# Altium PCB line abu2.PcbDoc
Units mm, origin at the board's own origin, x right, y up, seen from the top; angles counter-clockwise.
Board outline 152.4 x 101.6 mm, 2 copper layers (Top Layer, Bottom Layer); 21 components, 12 nets, 63 pads, 0 vias.
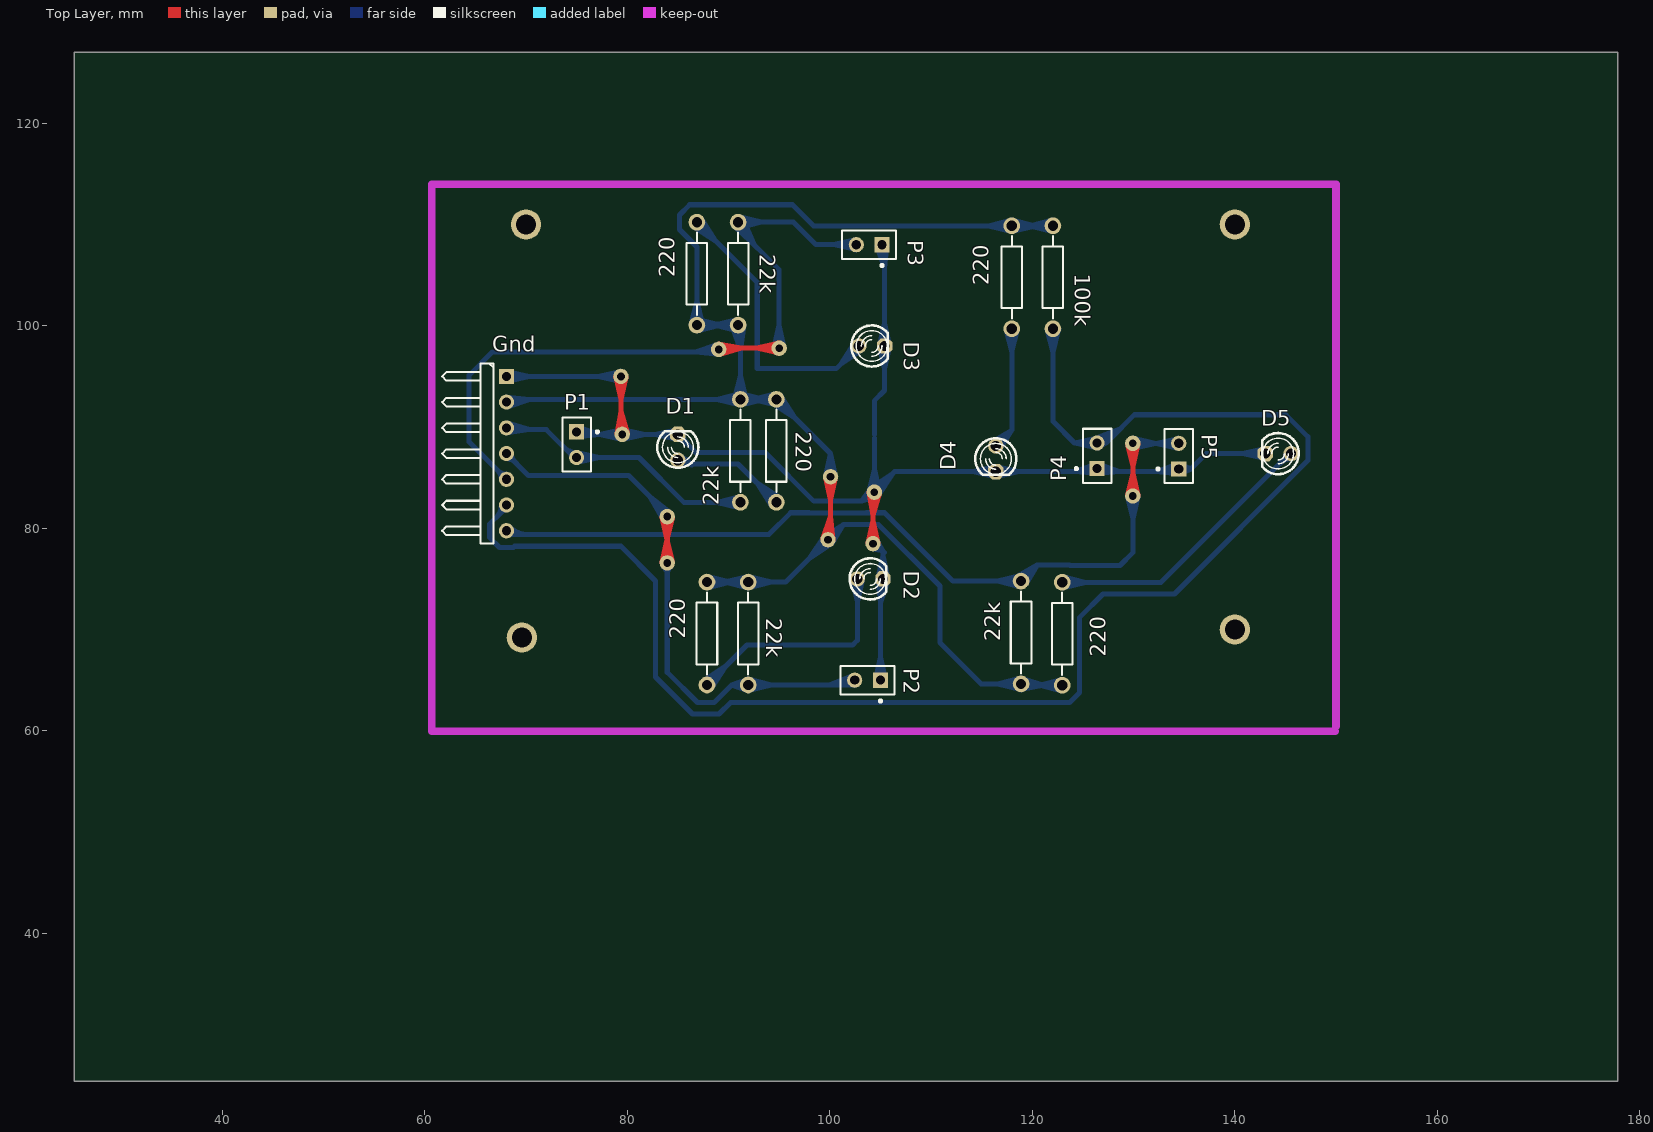
[diagram p0: Top Layer view]
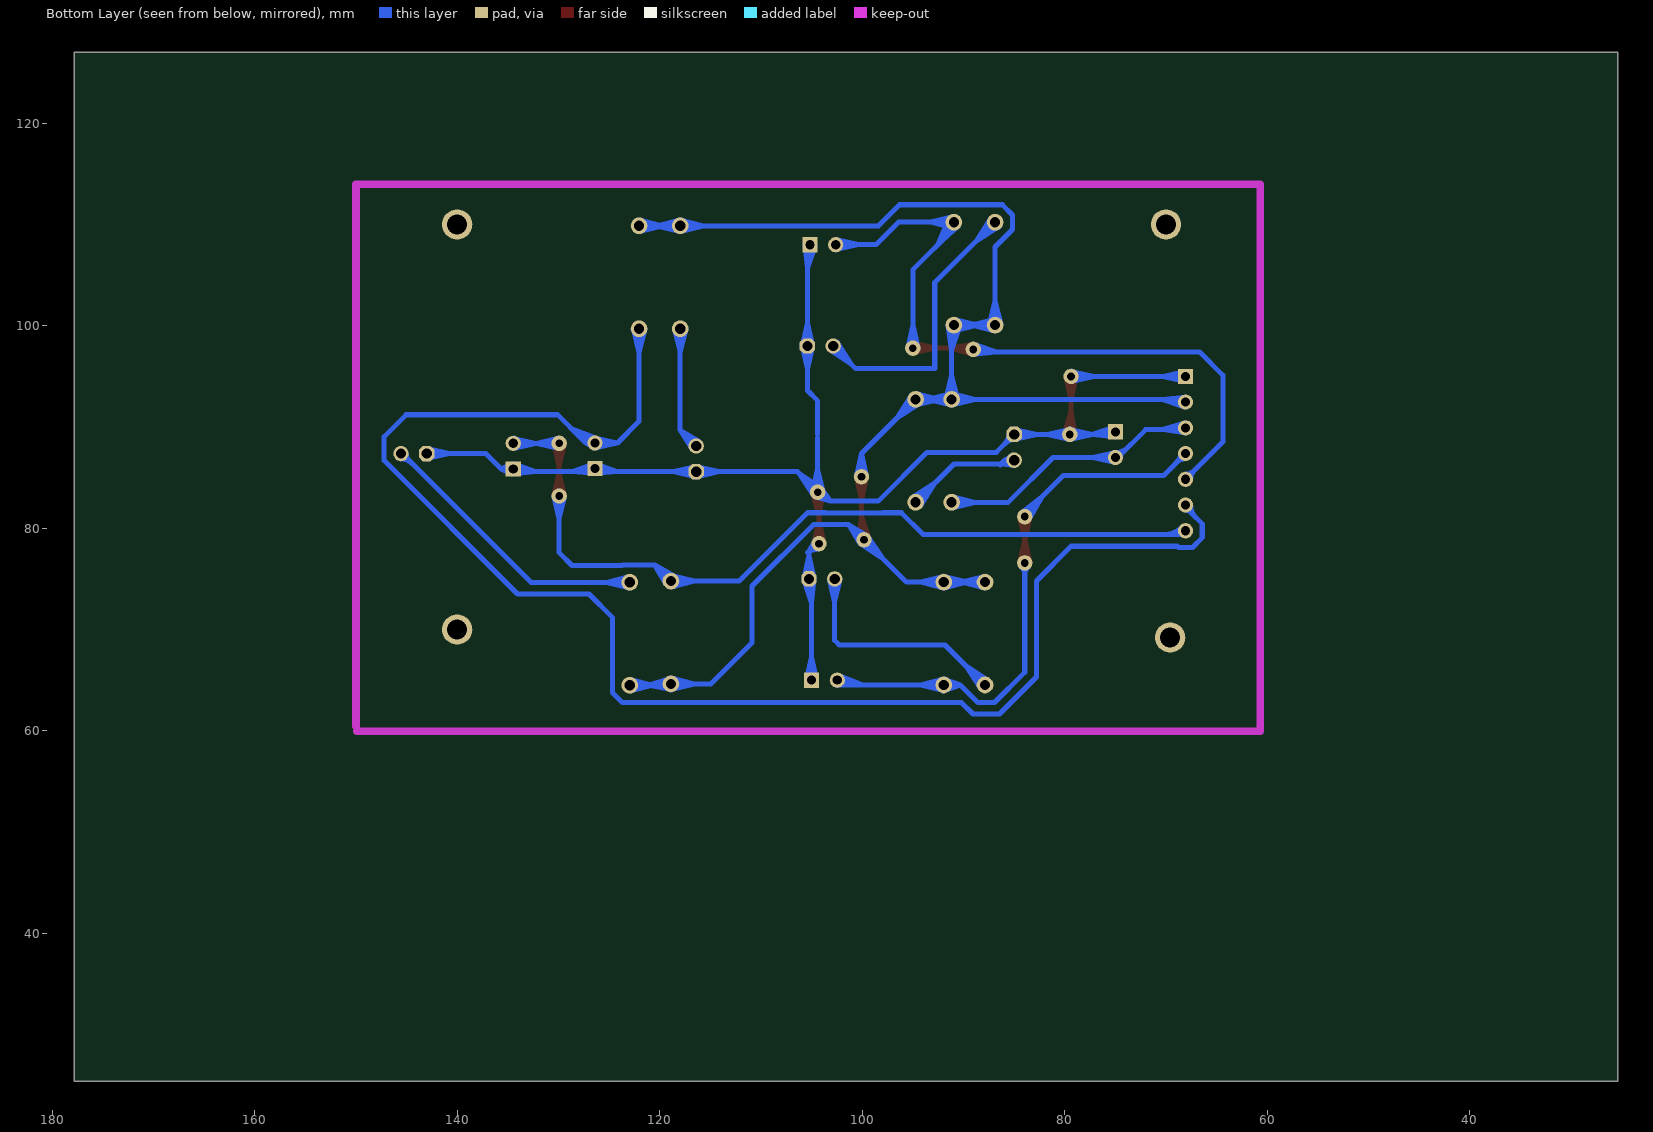
[diagram p1: Bottom Layer view, seen from below]

## Layer stack, top to bottom
Top Solder: solder mask 0.0102, Solder Resist, Dk 3.5
Top Layer: signal copper 0.0356
Dielectric1: dielectric 0.32, FR-4, Dk 4.8
Bottom Layer: signal copper 0.0356
Bottom Solder: solder mask 0.0102, Solder Resist, Dk 3.5

## Board outline
25.4,25.4 177.8,25.4 177.8,127 25.4,127

## Design rules (kind name [scope] priority, off if disabled: settings)
Clearance [All] p1: gap=0.1
PolygonConnect [All] p1: connectstyle=Relief reliefconductorwidth=0.254 reliefentries=4 polygonreliefangle="90 Angle" airgapwidth=0.254
RoutingVias [All] p1: holewidth=0.711 width=1.27 viastyle="Through Hole" minholewidth=0.711 minwidth=1.27 maxholewidth=0.711 maxwidth=1.27
SilkToSolderMaskClearance SilkscreenOverComponentPads [IsPad] p1: minsilkscreentomaskgap=0.254 clearancetoexposedcopper=TRUE
SolderMaskExpansion [All] p1: expansion=0.102
Width [All] p1: maxlimit=0.5 minlimit=0.5 preferedwidth=0.5
28 further rules are at their usual default settings.

## Components (designator, comment, footprint, x,y, rotation, side; value= is the part's Value field where it differs from the comment)
22k "1k" My_axial-0.4 91.186,87.63 r270 top (schematic designator Rp1)
22k "1k" My_axial-0.4 91.948,69.596 r270 top (schematic designator Rp2)
22k "1k" My_axial-0.4 90.932,105.156 r90 top (schematic designator Rp3)
22k "1k" My_axial-0.4 118.872,69.723 r90 top (schematic designator Rp5)
100k "1k" My_axial-0.4 122.047,104.775 r270 top (schematic designator Rp4)
220 "1k" My_axial-0.4 94.742,87.63 r270 top (schematic designator R1)
220 "1k" My_axial-0.4 87.884,69.596 r270 top (schematic designator R2)
220 "1k" My_axial-0.4 86.868,105.156 r90 top (schematic designator R3)
220 "1k" My_axial-0.4 117.983,104.775 r270 top (schematic designator R4)
220 "1k" My_axial-0.4 122.936,69.596 r90 top (schematic designator R5)
D1 "LED" My_LED3MM 85,88 r90 top
D2 "LED" My_LED3MM 103.984,75 r0 top
D3 "LED" My_LED3MM 104.14,98 r0 top
D4 "LED" My_LED3MM 116.397,86.857 r270 top
D5 "LED" My_LED3MM 144.272,87.376 r180 top
Gnd "Header 7H" HDR1X7H 68.072,94.996 r270 top (schematic designator "Header 7")
P1 "Photo Sen" PIN2 75,89.524 r270 top
P2 "Photo Sen" PIN2 105,65 r180 top
P3 "Photo Sen" PIN2 105.156,108 r180 top
P4 "Photo Sen" PIN2 126.397,85.889 r90 top
P5 "Photo Sen" PIN2 134.459,85.852 r90 top

## Footprints (in the part's own frame and the unit in brackets; to place one, negate y for a bottom-side part, rotate by r counter-clockwise, add the part's x,y. Pads: shape width x height; smd on the part's side, far side on the other; paste and mask are expansions set on the pad)
HDR1X7H [mm] "Connector; Header; 7 Position; Right Angle"
  rect 1.5x1.5 hole 0.9: 1(0,0)
  round 1.5 hole 0.9: 2(2.54,0) 3(5.08,0) 4(7.62,0) 5(10.16,0) 6(12.7,0) 7(15.24,0)
  silkscreen extent -1.27,-6.35 16.51,-1.27
My_axial-0.4 [mil]
  round 65 hole 40: 1(-200.5,-0.5) 2(199.5,-0.5)
  silkscreen extent -160,-41 160,40
My_LED3MM [mil]
  round 60 hole 40: A(-50,0)
  oct 60x60 hole 40: K(50,0)
  silkscreen extent -80,-80 62,80
PIN2 [mm] "Photosensitive Diode; 2 Leads"
  rect 1.5x1.5 hole 0.9: 1(0,0)
  round 1.5 hole 0.9: 2(2.54,0)
  silkscreen extent -1.4,-1.4 3.94,2.18

## Part data
22k 22k 22k 22k 100k 220 220 220 220 220: library part Res, "resistor 1/4 wat"
D1 D2 D3 D4 D5: "Typical INFRARED GaAs LED"
Gnd: "Header, 7-Pin, Right Angle"
P1 P2 P3 P4 P5: "Photosensitive Diode"

## Free pads (board coordinates)
  round 1.524 hole 0.762: 0(79.375,94.996) 1(79.502,89.27) 2(129.921,88.392) 3(129.921,83.185) 4(94.996,97.79) 5(89.027,97.663) 6(83.947,81.153) 6(104.267,78.486) 7(83.947,76.581) 7(104.394,83.566) 8(99.822,78.867) 9(100.076,85.09)
  round 3 hole 2: 1(70,110) 4(69.596,69.215) 8(140,110) 9(140,70)

## Nets (pads, with @x,y where several pads share a name; then routed paths per layer and width w, separated by ;. In a path a pad name is that pad's centre, name@x,y a point inside that pad or via, vN(x,y) a via of type N, cw(c..) or ccw(c..) an arc to the next point about the centre after c; other vN are vias at no path point)
GND: D1.K D2.K D3.K D4.K D5.K Gnd.1 P1.1 P2.1 P3.1 P4.1 P5.1 pad.0 pad.1@79.502,89.27 pad.6@104.267,78.486 pad.7@104.394,83.566 | length 327.5
  Top Layer w0.5: pad.0@78.866,94.938 79.375,92.734 pad.0@79.884,94.938 ; pad.1@78.991,89.299 79.375,91.541 ; pad.0@79.013,94.634 cw(c78.139,93.76) 79.375,93.76 cw(c80.611,93.76) pad.0@79.737,94.634 ; pad.1@79.14,89.632 ccw(c78.573,90.199) 79.375,90.199 ; 79.375,90.813 ccw(c81.045,90.813) pad.1@79.864,89.632 ; pad.0 79.375,89.397 79.502,89.27 79.375,91.541 ; pad.1@80.007,89.356 79.375,91.541 ; pad.6@103.758,78.544 104.267,80.748 pad.6@104.776,78.544 ; pad.7@103.883,83.537 104.267,81.295 ; pad.6@103.905,78.848 ccw(c103.031,79.722) 104.267,79.722 ccw(c105.503,79.722) pad.6@104.629,78.848 ; pad.7@104.032,83.204 cw(c103.465,82.637) 104.267,82.637 ; pad.6@104.267,78.486 104.267,83.439 104.394,83.566 104.267,81.295 ; 104.267,82.023 cw(c105.937,82.023) pad.7@104.756,83.204 ; pad.7@104.899,83.48 104.267,81.295
  Bottom Layer w0.5: Gnd.1 pad.0 pad.0@79.629,95.25 ; Gnd.1@68.128,94.499 70.322,94.996 Gnd.1@68.128,95.493 ; Gnd.1@68.426,94.642 cw(c69.279,93.789) 69.279,94.996 cw(c69.279,96.203) Gnd.1@68.426,95.35 ; P1.1@74.999,89.024 77.303,89.27 ; P1.1@75.108,90.012 77.303,89.27 ; P1.1@75.354,89.878 ccw(c76.82,91.344) 76.82,89.27 ; pad.0@79.013,94.634 ccw(c78.139,93.76) 78.139,94.996 ccw(c78.139,96.232) pad.0@79.013,95.358 ; pad.1@79.14,88.908 ccw(c78.266,88.034) 78.266,89.27 ccw(c78.266,90.506) pad.1@79.14,89.632 ; pad.0@79.317,94.487 77.113,94.996 pad.0@79.317,95.505 ; pad.1@79.444,88.761 77.24,89.27 pad.1@79.444,89.779 ; pad.1@79.56,88.761 81.764,89.27 pad.1@79.56,89.779 ; pad.1@79.864,88.908 cw(c80.738,88.034) 80.738,89.27 cw(c80.738,90.506) pad.1@79.864,89.632 ; D1.K@84.638,88.908 ccw(c83.764,88.034) 83.764,89.27 ccw(c83.764,90.506) D1.K@84.638,89.632 ; D1.K@84.942,88.761 82.738,89.27 D1.K@84.942,89.779 ; D1.K@85,88.758 cw(c85,87.522) 85.874,88.396 cw(c86.748,89.27) D1.K@85.512,89.27 ; pad.7@103.759,83.312 103.124,82.677 ; pad.7@103.885,83.624 104.394,85.828 pad.7@104.903,83.624 ; pad.7@104.032,83.928 ccw(c103.158,84.802) 104.394,84.802 ccw(c105.63,84.802) pad.7@104.756,83.928 ; pad.7@104.035,83.931 103.124,82.677 ; pad.6@104.054,78.02 105.254,77.753 ; pad.7@104.07,83.962 106.217,85.389 pad.7@104.79,83.242 ; pad.6@104.267,78.486 105.254,77.753 ; pad.6@104.336,77.979 cw(c104.503,76.748) 105.381,77.626 ; pad.6@104.394,78.613 105.254,77.753 ; pad.7@104.394,84.078 ccw(c104.394,85.314) 105.268,84.44 ccw(c106.142,83.566) pad.7@104.906,83.566 ; 104.394,88.9 pad.7@104.394,83.566 ; 104.394,89.27 104.394,92.583 105.41,93.599 D3.K 105.41,107.746 P3.1 105.41,105.697 ; P2.1@104.503,65.056 105,67.25 P2.1@105.497,65.056 ; pad.7@104.521,83.185 104.648,83.312 pad.7@104.394,83.566 ; pad.7@104.614,83.104 103.124,82.677 ; P2.1@104.646,65.354 ccw(c103.793,66.207) 105,66.207 ccw(c106.207,66.207) P2.1@105.354,65.354 ; pad.6@104.651,78.824 105.254,77.753 ; P3.1@104.668,107.892 105.41,105.697 ; D2.K@104.742,75 105,72.686 ; D2.K@104.745,75.058 105.254,77.262 D2.K@105.763,75.058 ; pad.6@104.779,78.486 ccw(c105.402,78.486) 104.961,78.046 ; P3.1@104.802,107.646 cw(c103.336,106.18) 105.41,106.18 ; D2.K@104.892,75.362 ccw(c104.018,76.236) 105.254,76.236 ccw(c106.49,76.236) D2.K@105.616,75.362 ; D3.K@104.901,97.942 105.41,95.738 D3.K@105.919,97.942 ; D3.K@104.901,98.058 105.41,100.262 D3.K@105.919,98.058 ; P2.1 105,74.746 D2.K ; 105,73.151 cw(c107.103,73.151) D2.K@105.616,74.638 ; D3.K@105.048,97.638 cw(c104.174,96.764) 105.41,96.764 cw(c106.646,96.764) D3.K@105.772,97.638 ; D3.K@105.048,98.362 ccw(c104.174,99.236) 105.41,99.236 ccw(c106.646,99.236) D3.K@105.772,98.362 ; P3.1@105.656,108.001 105.41,105.697 ; D2.K@105.754,74.888 105,72.686 ; D4.K@116.035,85.225 ccw(c115.161,84.351) 115.161,85.587 ccw(c115.161,86.823) D4.K@116.035,85.949 ; D4.K@116.339,85.078 114.135,85.587 D4.K@116.339,86.096 ; D4.K@116.455,85.078 118.659,85.587 D4.K@116.455,86.096 ; D4.K@116.759,85.225 cw(c117.633,84.351) 117.633,85.587 cw(c117.633,86.823) D4.K@116.759,85.949 ; 124.461,85.587 ccw(c124.461,87.825) P4.1@126.043,86.243 ; P4.1@125.668,85.587 ccw(c125.668,86.618) P4.1 ; P4.1@126.279,86.375 124.097,85.587 ; P4.1@126.386,85.389 128.696,85.587 ; P4.1@126.408,85.389 124.097,85.587 ; P4.1@126.515,86.375 128.696,85.587 ; P4.1@126.667,86.095 P4.1@126.873,85.889 ; P4.1@126.751,86.243 ccw(c128.333,87.825) 128.333,85.587 ; P4.1@127.126,85.587 cw(c127.126,86.618) P4.1 ; 132.612,85.587 ccw(c132.612,87.699) P5.1@134.105,86.206 ; P5.1@134.348,86.339 132.178,85.587 ; P5.1@134.462,85.352 132.178,85.587 ; P5.1@134.565,85.363 135.636,85.852 ; P5.1@134.565,86.341 135.636,85.852 ; P5.1@134.736,85.587 D4.K 106.415,85.587 pad.7@104.394,83.566 ; P5.1@134.819,85.505 cw(c135.636,84.717) 135.636,85.852 ; P5.1@134.819,86.199 ccw(c135.636,86.987) 135.636,85.852 ; D5.K@142.64,87.014 ccw(c141.766,86.14) 141.766,87.376 ccw(c141.766,88.612) D5.K@142.64,87.738 ; D5.K@142.944,86.867 140.74,87.376 ; D5.K@142.944,87.885 140.74,87.376 ; 77.303,89.27 P1.1 75.254,89.27 D1.K 86.767,87.503 93.599,87.503 98.425,82.677 103.124,82.677 ; 103.124,82.677 pad.7@104.394,83.566 ; 105,72.686 D2.K ; D2.K 105.254,77.753 ; 124.097,85.587 P4.1 ; P4.1 128.696,85.587 ; 132.178,85.587 P5.1 135.636,85.852 ; 135.636,85.852 137.16,87.376 D5.K 140.74,87.376
NetD1_A: 220.2@94.729,82.563 D1.A | length 34.9
  Bottom Layer w0.5: D1.A@84.953,86.22 86.291,86.353 ; D1.A@85.004,86.719 cw(c85.388,85.651) 86.19,86.453 ; D1.A@85.008,86.721 cw(c85.462,86.154) 85.976,86.668 ; D1.A@85.235,87.185 86.291,86.353 ; D1.A@85.32,86.331 cw(c85.813,85.716) 86.37,86.273 ; D1.A@85.437,86.463 cw(c85.914,86.171) 85.914,86.73 ; D1.A@85.437,86.997 ccw(c85.914,87.289) 85.914,86.73 ; 220.2@94.154,82.563 ccw(c92.764,82.563) 93.747,83.545 ccw(c94.729,84.528) 220.2@94.729,83.138 ; 220.2@94.281,82.202 92.843,84.449 ; 220.2@95.09,83.011 92.843,84.449 ; D1.A 85.914,86.73 ; D1.A 86.291,86.353 ; D1.A 85.914,86.73 ; 85.914,86.73 85.143,86.239 85.914,86.73 ; 85.914,86.73 85.143,87.221 85.914,86.73 ; 85.914,86.73 86.291,86.353 ; 86.291,86.353 90.939,86.353 94.729,82.563 92.843,84.449
NetD2_A: 220.2@87.871,64.529 D2.A | length 36.7
  Bottom Layer w0.5: 220.2@87.511,64.977 89.757,66.415 220.2@88.32,64.168 ; 220.2@87.871,64.529 91.821,68.478 102.26,68.478 102.714,68.932 D2.A ; 220.2@87.871,65.104 ccw(c87.871,66.494) 88.854,65.511 ccw(c89.836,64.529) 220.2@88.447,64.529 ; D2.A@102.205,74.942 102.714,72.738 D2.A@103.223,74.942 ; D2.A@102.352,74.638 cw(c101.478,73.764) 102.714,73.764 cw(c103.95,73.764) D2.A@103.076,74.638
NetD3_A: 220.2@86.881,110.223 D3.A | length 43
  Bottom Layer w0.5: 220.2@86.52,109.775 88.767,108.337 220.2@87.329,110.584 ; 220.2@86.881,109.648 cw(c86.881,108.258) 87.863,109.241 cw(c88.846,110.223) 220.2@87.456,110.223 ; 220.2@86.881,110.223 92.837,104.267 92.837,95.758 100.628,95.758 D3.A D3.A@102.489,98.381 ; D3.A@102.358,98 cw(c101.122,98) 101.996,97.126 cw(c102.87,96.252) D3.A@102.87,97.488 ; D3.A@102.474,98.324 101.047,96.177 D3.A@103.194,97.604
NetD4_A: 220.2@117.97,99.708 D4.A | length 26.1
  Bottom Layer w0.5: D4.A@116.079,88.528 117.97,89.7 ; D4.A 117.97,89.7 ; D4.A@116.397,88.639 ccw(c116.397,89.875) 117.271,89.001 ccw(c118.145,88.127) D4.A@116.909,88.127 ; D4.A@116.798,87.809 117.97,89.7 ; 220.2@117.399,99.636 117.97,97.382 220.2@118.541,99.636 ; 220.2@117.54,99.277 117.97,99.708 117.97,89.7 ; 220.2@117.563,99.301 cw(c116.581,98.318) 117.97,98.318 cw(c119.36,98.318) 220.2@118.377,99.301
NetD5_A: 220.2@122.949,74.663 D5.A | length 36.6
  Bottom Layer w0.5: 220.2@122.949,74.663 132.705,74.663 145.418,87.376 D5.A ; 220.2@123.02,74.092 125.274,74.663 220.2@123.02,75.234 ; 220.2@123.356,74.256 cw(c124.338,73.274) 124.338,74.663 cw(c124.338,76.053) 220.2@123.356,75.07 ; 144.456,86.414 cw(c145.542,85.328) D5.A@145.542,86.864 ; 144.756,86.714 ccw(c144.094,87.376) D5.A@145.03,87.376
"NetHeader 7_3": 22k.2@91.173,82.563 Gnd.3 P1.2 | length 52.3
  Bottom Layer w0.5: Gnd.3@68.089,89.416 70.339,89.742 ; Gnd.3@68.165,90.407 70.339,89.742 ; Gnd.3@68.426,89.562 cw(c68.86,89.128) 68.86,89.742 ; Gnd.3@68.426,90.27 ccw(c69.699,91.543) 69.699,89.742 ; 73.749,88.002 ccw(c75,89.253) P1.2@75,87.484 ; 74.311,87.44 cw(c73.855,86.984) P1.2@74.5,86.984 ; P1.2@75.056,86.487 77.25,86.984 P1.2@75.056,87.481 ; P1.2@75.354,86.63 cw(c76.207,85.777) 76.207,86.984 cw(c76.207,88.191) P1.2@75.354,87.338 ; 22k.2@90.766,82.156 ccw(c89.784,81.173) 89.784,82.563 ccw(c89.784,83.952) 22k.2@90.766,82.97 ; 22k.2@91.102,81.992 88.848,82.563 ; 22k.2@91.102,83.134 88.848,82.563 ; 70.339,89.742 Gnd.3 68.246,89.742 72.009,89.742 74.767,86.984 P1.2 81.164,86.984 85.585,82.563 91.173,82.563 88.848,82.563
"NetHeader 7_4": 22k.2@91.935,64.529 Gnd.4 P2.2 pad.6@83.947,81.153 pad.7@83.947,76.581 | length 105.9
  Top Layer w0.5: pad.7@83.438,76.639 83.947,78.843 pad.7@84.456,76.639 ; pad.6@83.438,81.095 83.947,78.891 pad.6@84.456,81.095 ; pad.7@83.585,76.943 ccw(c82.711,77.817) 83.947,77.817 ccw(c85.183,77.817) pad.7@84.309,76.943 ; pad.6@83.585,80.791 cw(c82.711,79.917) 83.947,79.917 cw(c85.183,79.917) pad.6@84.309,80.791 ; pad.7@83.947,76.581 pad.6@83.947,81.153
  Bottom Layer w0.5: Gnd.4@68.072,86.876 cw(c68.072,85.669) 68.926,86.522 cw(c69.779,87.376) Gnd.4@68.572,87.376 ; Gnd.4 70.231,85.217 80.137,85.217 pad.6@84.074,81.28 ; 82.893,82.461 cw(c81.586,81.153) pad.6@83.435,81.153 ; 83.507,81.847 ccw(c83.947,82.288) pad.6@83.947,81.665 ; pad.6@83.529,80.858 82.268,83.086 ; pad.7@83.585,76.219 cw(c82.711,75.345) 83.947,75.345 cw(c85.183,75.345) pad.7@84.309,76.219 ; pad.7@83.947,76.581 83.947,65.786 86.93,62.803 88.586,62.803 90.312,64.529 ; pad.6@83.947,81.153 82.268,83.086 ; pad.6@84.298,81.526 82.268,83.086 ; 22k.2@91.528,64.122 ccw(c90.546,63.139) 90.546,64.529 ccw(c90.546,65.918) 22k.2@91.528,64.936 ; 22k.2@91.833,63.962 90.312,64.529 ; 22k.2@91.833,65.095 90.312,64.529 ; 22k.2@92.007,63.958 94.261,64.529 22k.2@92.007,65.1 ; 22k.2@92.342,64.122 cw(c93.325,63.139) 93.325,64.529 cw(c93.325,65.918) 22k.2@92.342,64.936 ; 100.115,64.529 ccw(c100.115,67.345) P2.2@102.106,65.354 ; 101.322,64.529 ccw(c101.322,66.138) P2.2 ; P2.2@102.319,65.48 99.97,64.529 ; P2.2@102.504,64.502 99.97,64.529 ; 90.312,64.529 22k.2@91.935,64.529 ; 90.312,64.529 22k.2@91.935,64.529 ; 22k.2@91.935,64.529 101.989,64.529 P2.2 ; 99.97,64.529 P2.2
"NetHeader 7_5": 22k.2@90.945,110.223 Gnd.5 P3.2 pad.4@94.996,97.79 pad.5 | length 130.6
  Top Layer w0.5: pad.5@89.027,97.409 89.408,97.79 pad.4@94.996,97.79 ; pad.5 91.305,97.79 ; pad.5@89.056,98.174 91.305,97.79 ; pad.5@89.113,97.158 91.305,97.79 ; pad.5@89.389,97.301 cw(c90.57,96.12) 90.57,97.79 ; pad.5@89.389,98.025 ccw(c89.956,98.592) 89.956,97.79 ; pad.4@94.634,97.428 ccw(c93.76,96.554) 93.76,97.79 ccw(c93.76,99.026) pad.4@94.634,98.152 ; pad.4@94.938,97.281 92.734,97.79 pad.4@94.938,98.299
  Bottom Layer w0.5: Gnd.5@67.572,84.836 ccw(c66.365,84.836) 67.218,85.69 ccw(c68.072,86.543) Gnd.5@68.072,85.336 ; Gnd.5@68.072,84.963 Gnd.5 64.389,88.519 64.389,95.123 66.675,97.409 pad.5@89.408,97.409 ; 87.178,97.409 ccw(c87.178,99.512) pad.5@88.665,98.025 ; pad.5@88.914,98.162 86.739,97.409 ; pad.5@89.027,97.151 86.739,97.409 ; pad.5 86.739,97.409 ; 22k.2@90.514,109.841 92.528,108.005 ; 22k.2@91.016,109.652 93.27,110.223 22k.2@91.016,110.794 ; 22k.2@91.02,110.223 ccw(c92.736,110.223) 91.523,109.01 ; 22k.2@91.352,109.816 cw(c92.334,108.834) 92.334,110.223 cw(c92.334,111.613) 22k.2@91.352,110.63 ; 22k.2@91.446,110.506 92.528,108.005 ; 22k.2@91.52,110.223 ccw(c94.443,110.223) 92.376,108.157 ; pad.4@94.487,97.848 94.996,100.052 ; pad.4@94.634,98.152 ccw(c93.76,99.026) 94.996,99.026 ccw(c96.232,99.026) pad.4@95.358,98.152 ; pad.4@94.996,97.409 94.996,105.537 90.945,109.588 22k.2@90.945,110.223 ; pad.4@94.996,97.79 94.996,100.052 ; pad.4@95.505,97.848 94.996,100.052 ; P3.2@102.262,107.646 ccw(c101.409,106.793) 101.409,108 ccw(c101.409,109.207) P3.2@102.262,108.354 ; P3.2@102.56,107.503 100.366,108 P3.2@102.56,108.497 ; P3.2 98.629,108 96.406,110.223 22k.2@90.945,110.223 ; 22k.2@90.945,110.223 92.528,108.005
"NetHeader 7_6": 100k.2 Gnd.6 P4.2 | length 184.8
  Bottom Layer w0.5: 67.072,81.09 ccw(c65.866,82.296) Gnd.6@67.572,82.296 ; 67.571,81.588 cw(c68.072,81.088) Gnd.6@68.072,81.796 ; Gnd.6 68.072,82.089 66.422,80.439 66.422,79.073 67.389,78.106 68.755,78.106 68.874,78.225 79.375,78.225 82.797,74.803 82.797,65.31 86.453,61.653 89.062,61.653 90.212,62.803 116.947,62.803 116.973,62.778 123.663,62.778 124.674,63.789 124.674,71.207 126.98,73.513 134.03,73.513 147.204,86.688 147.204,89.038 145.034,91.208 130.07,91.208 127.291,88.429 ; 100k.2@121.463,99.636 122.034,97.382 100k.2@122.605,99.636 ; 100k.2@121.627,99.301 cw(c120.645,98.318) 122.034,98.318 cw(c123.424,98.318) 100k.2@122.441,99.301 ; 100k.2 122.034,90.564 124.169,88.429 ; P4.2@126.043,88.075 ccw(c125.19,87.222) 125.19,88.429 ccw(c125.19,89.636) P4.2@126.043,88.783 ; P4.2@126.18,88.88 128.653,89.791 ; P4.2@126.341,87.932 124.169,88.429 ; P4.2@126.341,88.926 124.169,88.429 ; P4.2@126.397,88.929 ccw(c126.397,92.294) 128.777,89.915 ; P4.2@126.695,88.027 128.653,89.791 ; P4.2@126.823,88.167 cw(c127.291,87.88) 127.291,88.429 ; P4.2@126.823,88.691 ccw(c127.291,88.978) 127.291,88.429 ; 127.923,89.061 cw(c126.397,90.587) P4.2 ; 124.169,88.429 P4.2 ; P4.2 127.291,88.429 ; P4.2 128.653,89.791 ; P4.2 127.291,88.429 ; 127.291,88.429 126.537,87.949 127.291,88.429 ; 127.291,88.429 126.537,88.909 127.291,88.429
"NetHeader 7_7": 22k.2@118.885,74.79 Gnd.7 P5.2 pad.2 pad.3 | length 138.4
  Top Layer w0.5: pad.3@129.412,83.243 129.921,85.447 pad.3@130.43,83.243 ; pad.2@129.412,88.334 129.921,86.13 pad.2@130.43,88.334 ; pad.3@129.559,83.547 ccw(c128.685,84.421) 129.921,84.421 ccw(c131.157,84.421) pad.3@130.283,83.547 ; pad.2@129.559,88.03 cw(c128.685,87.156) 129.921,87.156 cw(c131.157,87.156) pad.2@130.283,88.03 ; pad.3 pad.2
  Bottom Layer w0.5: Gnd.7@68.426,80.11 ccw(c70.199,81.883) 70.199,79.375 ; 68.992,79.375 cw(c68.992,80.676) Gnd.7 68.453,79.375 93.982,79.375 96.141,81.534 97.942,81.534 97.949,81.527 103.6,81.527 103.607,81.534 105.41,81.534 112.154,74.79 118.885,74.79 120.483,76.389 ; 22k.2@118.478,74.383 ccw(c117.495,73.401) 117.495,74.79 ccw(c117.495,76.18) 22k.2@118.478,75.197 ; 22k.2@118.533,75.246 120.483,76.389 ; 22k.2@118.813,74.219 116.559,74.79 22k.2@118.813,75.361 ; 22k.2@118.885,75.366 ccw(c118.885,76.755) 119.867,75.773 ccw(c120.85,74.79) 22k.2@119.46,74.79 ; 22k.2@119.34,74.438 120.483,76.389 ; pad.3@129.412,83.127 129.921,80.923 ; pad.3@129.559,82.823 cw(c128.685,81.949) 129.921,81.949 cw(c131.157,81.949) pad.3@130.283,82.823 ; pad.3 129.921,80.923 ; pad.3@129.921,83.693 129.921,77.597 128.651,76.327 123.725,76.327 123.663,76.389 120.483,76.389 ; pad.2 132.183,88.392 ; pad.2@129.921,88.646 130.175,88.392 P5.2 132.209,88.392 ; pad.2@129.979,87.883 132.183,88.392 ; pad.2@129.979,88.901 132.183,88.392 ; pad.2@130.283,88.03 cw(c131.157,87.156) 131.157,88.392 cw(c131.157,89.628) pad.2@130.283,88.754 ; pad.3@130.43,83.127 129.921,80.923 ; P5.2@134.105,88.038 ccw(c133.252,87.185) 133.252,88.392 ccw(c133.252,89.599) P5.2@134.105,88.746 ; P5.2@134.403,87.895 132.209,88.392 ; P5.2@134.403,88.889 132.209,88.392
VCC: 22k.1 100k.1 220.1 Gnd.2 pad.8@99.822,78.867 pad.9@100.076,85.09 | length 326.2
  Top Layer w0.5: pad.8@99.322,78.979 100.076,81.176 ; pad.8@99.46,79.229 ccw(c97.973,80.716) 100.076,80.716 ; pad.9@99.567,85.032 100.076,82.828 pad.9@100.585,85.032 ; pad.9@99.714,84.728 cw(c98.84,83.854) 100.076,83.854 cw(c101.312,83.854) pad.9@100.438,84.728 ; pad.9@100.076,85.09 100.076,79.121 99.822,78.867 100.076,81.176 ; pad.8@100.334,78.867 100.076,81.176
  Bottom Layer w0.5: Gnd.2@68.068,92.956 70.367,92.723 ; Gnd.2@68.183,91.969 70.367,92.723 ; Gnd.2@68.426,92.102 cw(c69.923,90.605) 69.923,92.723 ; 220.1@86.31,100.135 86.881,102.389 220.1@87.452,100.135 ; 220.1@86.474,100.47 ccw(c85.491,101.453) 86.881,101.453 ccw(c88.27,101.453) 87.288,100.47 ccw(c88.27,101.453) 88.27,100.063 ccw(c88.27,98.674) 220.1@87.288,99.656 ; 220.1@86.952,99.492 89.206,100.063 220.1@86.952,100.634 ; 220.1@87.871,74.689 91.935,74.689 95.644,74.689 99.822,78.867 101.332,80.377 ; 220.1@87.943,74.118 90.197,74.689 220.1@87.943,75.26 ; 220.1@88.278,74.282 cw(c89.261,73.299) 89.261,74.689 cw(c89.261,76.078) 220.1@88.278,75.096 ; 22k.1@90.382,99.944 91.173,97.605 ; 22k.1@90.538,100.47 cw(c89.555,101.453) 89.555,100.063 cw(c89.555,98.674) 90.538,99.656 cw(c89.003,98.122) 91.173,98.122 ; 22k.1@90.602,92.794 91.173,95.048 22k.1@91.744,92.794 ; 22k.1@90.691,99.809 91.173,99.327 22k.1@91.173,92.723 ; 22k.1@90.766,92.316 ccw(c89.784,91.333) 89.784,92.723 ccw(c89.784,94.112) 90.766,93.13 ccw(c89.784,94.112) 91.173,94.112 ccw(c92.563,94.112) 91.58,93.13 ccw(c92.563,94.112) 92.563,92.723 ccw(c92.563,91.333) 22k.1@91.58,92.316 ; 22k.1@90.873,99.492 88.619,100.063 22k.1@90.873,100.634 ; 22k.1@91.102,92.152 88.848,92.723 22k.1@91.102,93.294 ; 91.173,99.226 cw(c91.782,99.226) 22k.1@91.352,99.656 ; 22k.1@91.245,92.152 93.499,92.723 22k.1@91.245,93.294 ; 22k.1@91.52,100.049 91.173,97.605 ; 22k.1@91.528,74.282 ccw(c90.546,73.299) 90.546,74.689 ccw(c90.546,76.078) 22k.1@91.528,75.096 ; 22k.1@91.864,74.118 89.61,74.689 22k.1@91.864,75.26 ; 22k.1@92.007,74.118 94.261,74.689 22k.1@92.007,75.26 ; 22k.1@92.342,74.282 cw(c93.325,73.299) 93.325,74.689 cw(c93.325,76.078) 22k.1@92.342,75.096 ; 220.1@94.322,92.316 ccw(c93.34,91.333) 93.34,92.723 ccw(c93.34,94.112) 220.1@94.322,93.13 ; 220.1@94.369,92.274 96.615,90.837 220.1@95.178,93.083 ; 220.1@94.658,92.152 92.404,92.723 220.1@94.658,93.294 ; 220.1@94.729,92.147 cw(c94.729,90.758) 95.712,91.74 cw(c96.694,92.723) 220.1@95.305,92.723 ; pad.8@99.31,78.867 cw(c98.074,78.867) 98.948,77.993 cw(c99.822,77.119) pad.8@99.822,78.355 ; pad.8@99.426,79.191 97.999,77.044 pad.8@100.146,78.471 ; pad.8@99.506,79.27 101.332,80.377 ; pad.9@99.567,85.148 100.076,87.352 pad.9@100.585,85.148 ; pad.9@99.714,85.452 ccw(c98.84,86.326) 100.076,86.326 ccw(c101.312,86.326) pad.9@100.438,85.452 ; pad.8@99.822,79.379 ccw(c99.822,80.615) 100.696,79.741 ccw(c101.57,78.867) pad.8@100.334,78.867 ; pad.9@100.076,85.09 100.076,87.376 94.729,92.723 22k.1@91.173,92.723 ; pad.8@100.225,78.551 101.332,80.377 ; 101.459,80.377 104.077,80.377 104.084,80.384 104.782,80.384 110.871,74.295 110.871,68.707 114.948,64.63 22k.1@118.885,64.63 ; 220.1@117.563,109.461 ccw(c116.581,108.478) 116.581,109.868 ccw(c116.581,111.257) 220.1@117.563,110.275 ; 220.1@117.899,109.297 115.645,109.868 220.1@117.899,110.439 ; 220.1@118.042,109.297 120.296,109.868 220.1@118.042,110.439 ; 220.1@118.377,109.461 cw(c119.36,108.478) 119.36,109.868 cw(c119.36,111.257) 220.1@118.377,110.275 ; 22k.1@118.478,64.223 ccw(c117.495,63.241) 117.495,64.63 ccw(c117.495,66.02) 22k.1@118.478,65.037 ; 22k.1@118.813,64.059 116.559,64.63 22k.1@118.813,65.201 ; 22k.1@118.924,64.056 121.217,64.503 ; 22k.1@118.987,65.197 121.217,64.503 ; 22k.1@119.292,64.223 cw(c119.967,63.548) 119.967,64.503 ; 22k.1@119.292,65.037 ccw(c120.581,66.326) 120.581,64.503 ; 100k.1@121.627,109.461 ccw(c120.645,108.478) 120.645,109.868 ccw(c120.645,111.257) 100k.1@121.627,110.275 ; 100k.1@121.963,109.297 119.709,109.868 100k.1@121.963,110.439 ; 100k.1 117.97,109.868 98.388,109.868 96.307,111.949 86.166,111.949 85.155,110.938 85.155,109.509 86.881,107.783 86.881,100.063 90.945,100.063 91.173,97.605 ; 220.1@122.542,64.096 ccw(c121.559,63.114) 121.559,64.503 ccw(c121.559,65.893) 220.1@122.542,64.91 ; 220.1@122.877,63.932 120.623,64.503 ; 220.1@122.877,65.074 120.623,64.503 ; 70.367,92.723 Gnd.2 67.839,92.456 68.106,92.723 22k.1@91.173,92.723 ; 22k.1@118.885,64.63 121.217,64.503 ; 22k.1@118.885,64.63 119.012,64.503 122.949,64.503 120.623,64.503

## Keep-outs
Keep-Out Layer:
  lines w0.75: 60.706,59.944 149.893,59.944 ; 60.706,60.198 60.706,113.954 149.987,113.954 149.987,60.447